# Altium PCB PCB1.PcbDoc
Units mil, origin at the board's own origin, x right, y up, seen from the top; angles counter-clockwise.
Board outline 3570 x 3040 mil, 2 copper layers (Top Layer, Bottom Layer); 32 components, 26 nets, 89 pads, 2 vias.
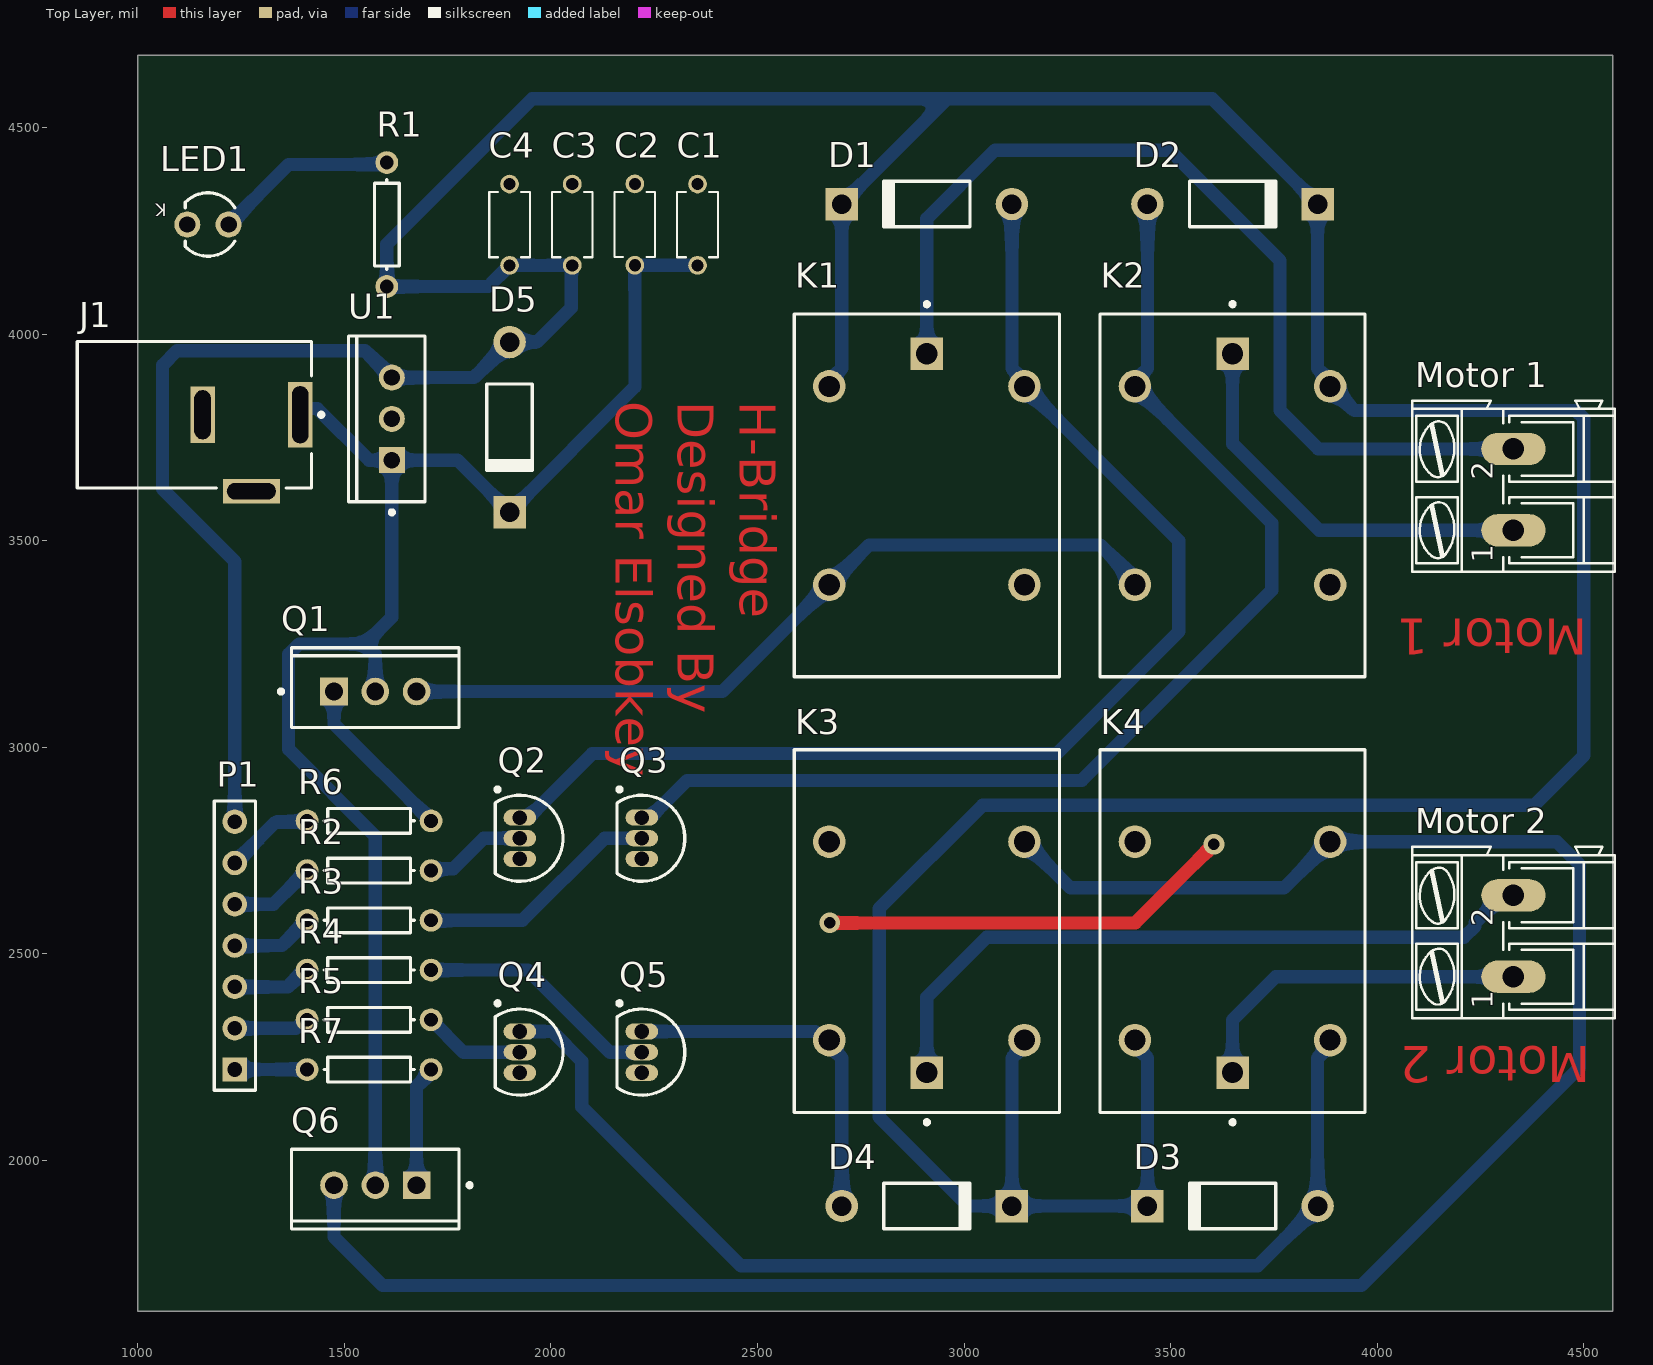
[diagram p0: Top Layer view]
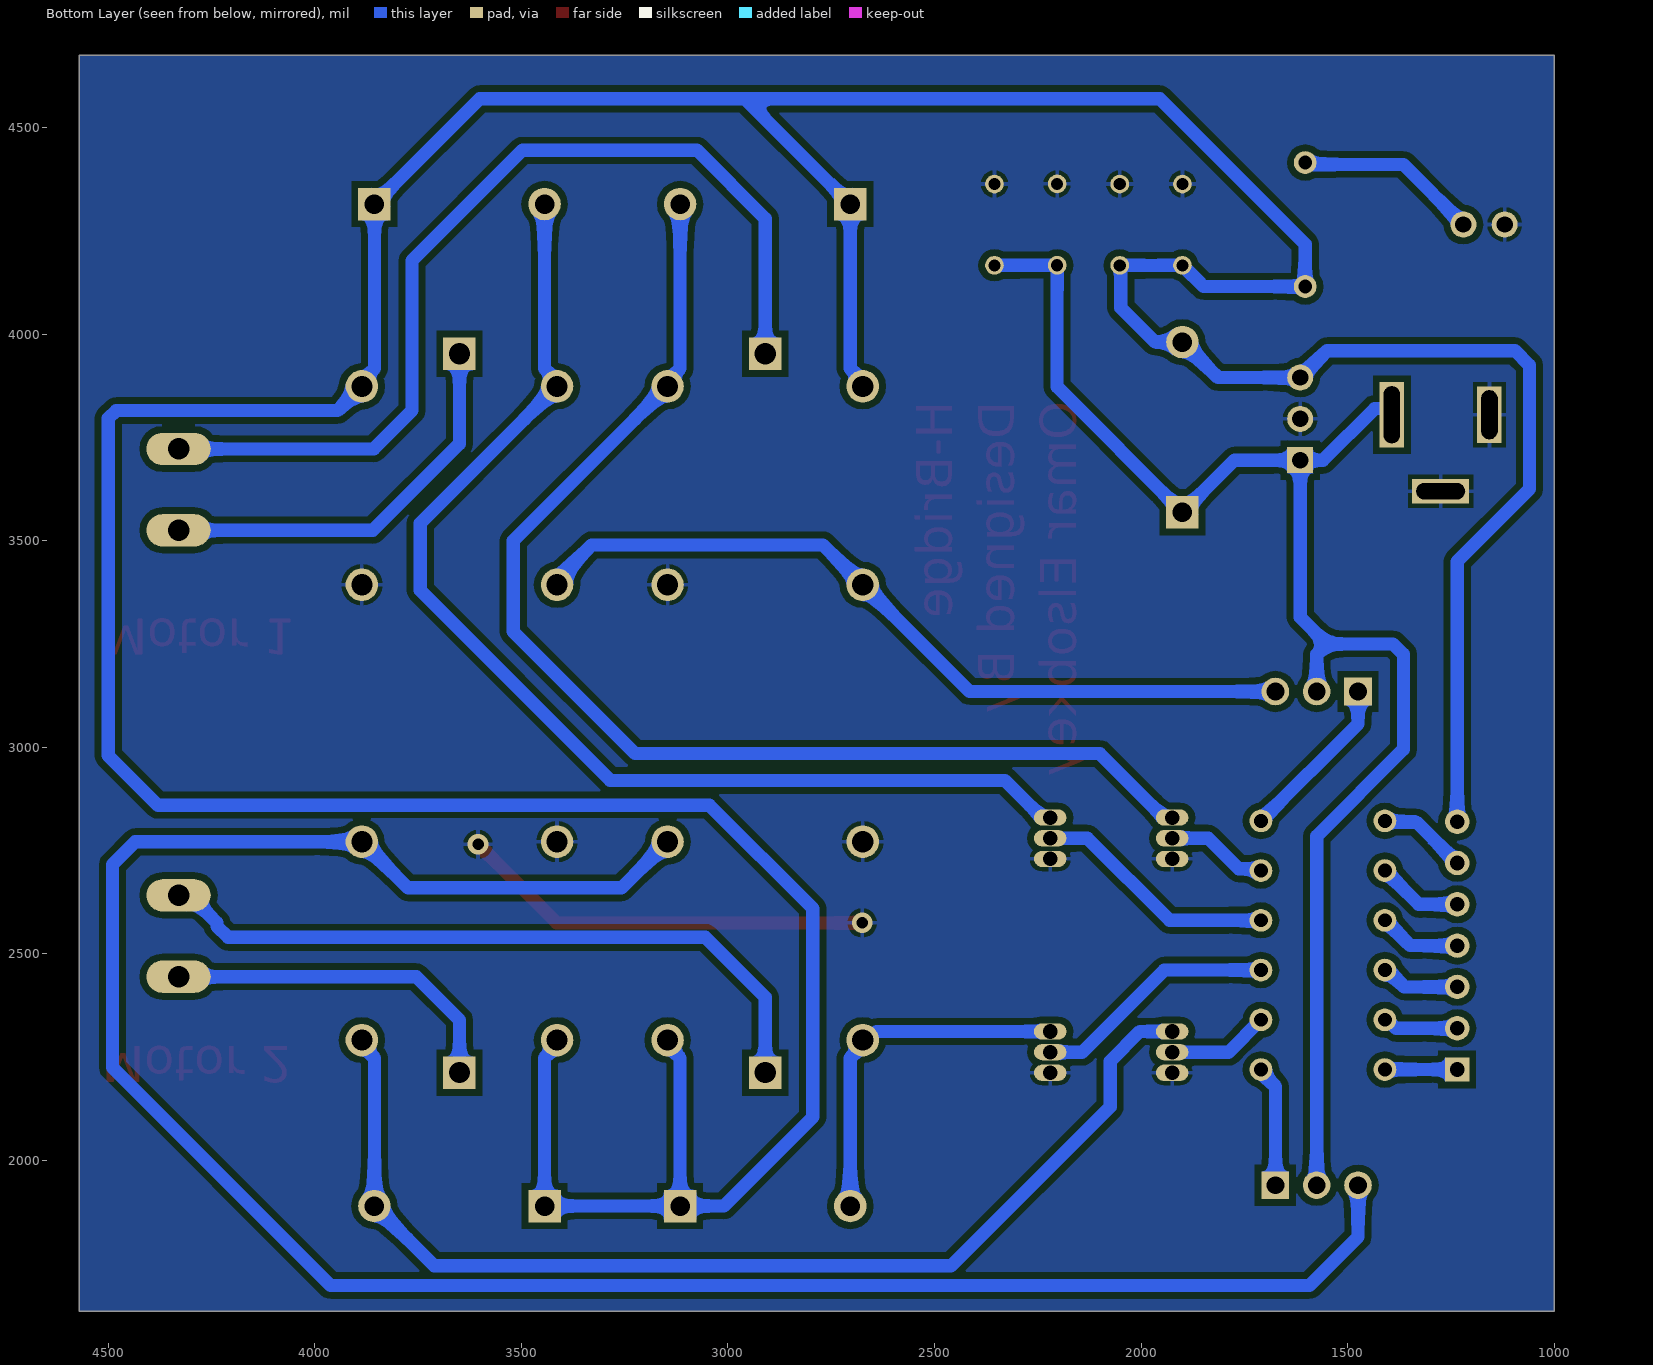
[diagram p1: Bottom Layer view, seen from below]

## Layer stack, top to bottom
Top Solder: solder mask 0.4, Solder Resist, Dk 3.5
Top Layer: signal copper 1.4
Dielectric 1: dielectric 12.6, FR-4, Dk 4.8
Bottom Layer: signal copper 1.4
Bottom Solder: solder mask 0.4, Solder Resist, Dk 3.5

## Board outline
1000,1635 4570,1635 4570,4675 1000,4675

## Design rules (kind name [scope] priority, off if disabled: settings)
Clearance B_GND [InNamedPolygon('B_GND')] p1: gap=16 ignorepadtopadclearanceinfootprint=FALSE
Clearance [All] p2: gap=16 ignorepadtopadclearanceinfootprint=FALSE
PolygonConnect [All] p1: connectstyle=Relief reliefconductorwidth=10 reliefentries=4 polygonreliefangle="90 Angle" airgapwidth=10
RoutingVias [All] p1: holewidth=28 width=50 viastyle="Through Hole" minholewidth=28 minwidth=50 maxholewidth=28 maxwidth=50
SolderMaskExpansion [All] p1: expansion=4 istentingtop=FALSE
UnRoutedNet [All] p1: checkbadconnections=TRUE
Width [All] p1: maxlimit=32 minlimit=32 preferedwidth=32
29 further rules are at their usual default settings.

## Components (designator, comment, footprint, x,y, rotation, side; value= is the part's Value field where it differs from the comment)
C1 "RDE5C2A220J0M1H03A" CAP_RDE5C2A220J0M1H03A 2355,4265 r90 top
C2 "RDE5C2A220J0M1H03A" CAP_RDE5C2A220J0M1H03A 2203.33,4265.33 r90 top
C3 "RDE5C2A220J0M1H03A" CAP_RDE5C2A220J0M1H03A 2051.67,4265 r90 top
C4 "RDE5C2A220J0M1H03A" CAP_RDE5C2A220J0M1H03A 1900,4265 r90 top
D1 "Diode 1N4004" DO-41 2910,4315 r180 top
D2 "Diode 1N4004" DO-41 3650,4315 r0 top
D3 "Diode 1N4004" DO-41 3650,1889.65 r180 top
D4 "Diode 1N4004" DO-41 2910,1889.65 r0 top
D5 "Diode 1N4004" DO-41 1900,3775 r270 top
J1 "PJ-002A" CUI-PJ-002A_V 1275,3805 r180 top
K1 "JS1-5V-F" FP-JS1-5V-F-MFG 2910,3610 r270 top
K2 "JS1-5V-F" FP-JS1-5V-F-MFG 3650,3610 r270 top
K3 "JS1-5V-F" FP-JS1-5V-F-MFG 2910,2555 r90 top
K4 "JS1-5V-F" FP-JS1-5V-F-MFG 3650,2555 r90 top
LED1 "151031SS06000" "Type 3mm" 1170,4265.45 r180 top
"Motor 1" "AK300/2" AK300/2 4330,3722.32 r90 top
"Motor 2" "AK300/2" AK300/2 4330,2641.73 r90 top
P1 "Header 7" HDR1X7 1235,2220 r90 top
Q1 "TIP120G" ONSC-TO-220-3-221A-09 1575,3135 r90 top
Q2 "NPN" TO-226-AA 1925,2779.84 r180 top
Q3 "NPN" TO-226-AA 2220,2779.84 r180 top
Q4 "NPN" TO-226-AA 1925,2262.13 r180 top
Q5 "NPN" TO-226-AA 2220,2262.13 r180 top
Q6 "TIP120G" ONSC-TO-220-3-221A-09 1575,1940 r270 top
R1 "Res1" AXIAL-0.3 1602.8,4265.33 r90 top value=1K
R2 "Res1" AXIAL-0.3 1560,2701.57 r0 top value=1K
R3 "Res1" AXIAL-0.3 1560,2581.18 r0 top value=1K
R4 "Res1" AXIAL-0.3 1560,2460.79 r0 top value=1K
R5 "Res1" AXIAL-0.3 1560,2340.39 r0 top value=1K
R6 "Res1" AXIAL-0.3 1560,2821.97 r0 top value=1K
R7 "Res1" AXIAL-0.3 1560,2220 r0 top value=1K
U1 "LM7805CT" FAIR-TO-220-3 1615,3795 r180 top

## Footprints (in the part's own frame and the unit in brackets; to place one, negate y for a bottom-side part, rotate by r counter-clockwise, add the part's x,y. Pads: shape width x height; smd on the part's side, far side on the other; paste and mask are expansions set on the pad)
AK300/2 [mil]
  oval 78x156 hole 52: 1(-197,0) 2(0,0)
  silkscreen extent -297,-245 117,245, body extent -319,-157 98,197, height 496
AXIAL-0.3 [mm] "Axial Device, Thru-Hole; 2 Leads; 0.3 in Pin Spacing"
  round 1.4 hole 0.85: 1(-3.81,0) 2(3.81,0)
  silkscreen extent -2.77,-0.76 2.77,0.76
CAP_RDE5C2A220J0M1H03A [mm]
  round 1.15 hole 0.75: 1(-2.5,0) 2(2.5,0)
  silkscreen extent -2,-1.25 2,1.25, body extent -2.75,-1.27 2.75,1.23, height 6
CUI-PJ-002A_V [mm] "THD, 3-Leads, Body 14.4x9mm, Height 11mm"
  rect 1.5x4 hole 1 slot 3.5 at 90 deg: 1(-3,0)
  rect 1.5x3.5 hole 1 slot 3 at 90 deg: 2(3,0)
  rect 3.5x1.5 hole 1 slot 3 at 0 deg: 3(0,4.7)
  silkscreen extent -4.43,-4.5 10.7,4.5, body extent -3.7,-4.5 10.7,4.9, height 11
DO-41 [mm] "Diode, Axial; Body 5.2 x 2.7 mm (LxDia. max), Lead Dia. 0.86 mm (max)"
  round 2 hole 1.2: 1(-5.23,0)
  rect 2x2 hole 1.2: 2(5.23,0)
  silkscreen extent -2.65,-1.4 2.75,1.4
FAIR-TO-220-3 [mm] "FM, 3-Leads, Body 10.2x4.7mm, Pitch 2.54mm"
  rect 1.6x1.6 hole 1: 1(0,2.54)
  round 1.6 hole 1: 2(0,0) 3(0,-2.54)
  silkscreen extent -2.04,-5.1 2.66,5.87, body extent -2.04,-5.1 2.66,5.1, height 18.95
FP-JS1-5V-F-MFG [mm]
  rect 2x2 hole 1.3 paste-1000 mask+0: 1(-8.7,0)
  round 2 hole 1.3 paste-1000 mask+0: 2(-6.7,-6) 3(5.5,-6) 4(5.5,6) 5(-6.7,6)
  silkscreen extent -11.87,-8.15 11.15,8.15, body extent -11.25,-8.25 11.25,8.25, height 0.25
HDR1X7 [mm] "Connector; Header; 7 Position"
  rect 1.5x1.5 hole 0.9: 1(0,0)
  round 1.5 hole 0.9: 2(2.54,0) 3(5.08,0) 4(7.62,0) 5(10.16,0) 6(12.7,0) 7(15.24,0)
  silkscreen extent -1.27,-1.27 16.51,1.27
ONSC-TO-220-3-221A-09 [mm] "FM, 3-Leads, Body 10.3x4.85mm, Pitch 2.54mm"
  rect 1.7x1.7 hole 1.1: 1(0,2.54)
  round 1.7 hole 1.1: 2(0,0) 3(0,-2.54)
  silkscreen extent -2.2,-5.15 2.7,5.92, body extent -2.18,-5.15 2.67,5.15, height 19.85
TO-226-AA [mm] "TO, Flat Index; 3 In-Line, Axial Leads; Body Dia. 4.8mm; Leads 0.55 x 0.51 mm (max)"
  oval 2x1 hole 0.9: 1(0,-1.27) 2(0,0) 3(0,1.27)
  silkscreen extent -2.65,-3.13 1.52,2.65, body extent -2.65,-2.66 1.52,2.66, height 5.33
"Type 3mm" [mm] "THT, LED-3mm, 2pin- Body 4.15mm(max)"
  round 1.6 hole 1: 1(1.27,0) 2(-1.27,0)
  silkscreen extent -1.66,-1.95 1.4,1.95, body extent -1.93,-1.94 1.87,1.94, height 10.5

## Part data
C1 C2 C3 C4: "Lead Capacitor C0G_EIA_ with Capacitance: 22pF and Rated Voltage: 100Vdc", Package="Radial Murata", Availability=Unavailable, MF=Murata, MP=RDE5C2A220J0M1H03A, Price=None, SnapEDA_Link=https://www.snapeda.com/parts/RDE5C2A220J0M1H03A/Murata/view-part/4545539/?ref=snap
D1 D2 D3 D4 D5: "1 Amp General Purpose Rectifier", Code_JEDEC=DO-204-AL, ComponentLink1Description="Manufacturer Link", ComponentLink1URL=http://www.fairchildsemi.com/, ComponentLink2Description=Datasheet, ComponentLink2URL=http://www.fairchildsemi.com/ds/1N%2F1N4001.pdf, DatasheetVersion=1998, LatestRevisionDate=17-Jul-2002, LatestRevisionNote="Re-released for DXP Platform.", PackageDescription="Diode, Axial; Body 5.2 x 2.7 mm (LxDia. max), Lead Dia. 0.86 mm (max)", PackageReference=DO-41, PackageVersion=Aug-1999, Published=8-Jun-2000, Publisher="Altium Limited"
J1: library part CMP-2000-06895-1, "Through Hole Right Angle DC Power Jack, 2.5 A, 2 mm Center Pin, 3 Position, -25 to 85 degC, RoHS, Bulk", Current Rating=2.5A, Flammability Rating=UL94V-0, Insulation Resistance=50MOhms, Manufacturer=CUIInc., Operating Temperature Range=-25Cto+85C, Package Description="3-Pin Through Hole Device, Body 14.4 x 9 mm, Height 11 mm", Voltage Rating=24V, Brand=CUI, Connector Type=DCPowerJack, Contact Gender=Male, Contact Material=Copper, Contact Plating=Nickel, Datasheet URL=http://www.cui.com/product/resource/pj-002a.pdf, Datasheet Version="Rev. 1.03, 04/2016", Factory Pack Quantity=500, Housing Material=PolybutyleneTerephthalate(PBT), Inside Contact Diameter=2mm, Manufacturer URL=http://www.cui.com/, Mounting Angle=Right, Mounting Style=ThroughHole, Mounting Technology=ThroughHole, Outside Contact Diameter=6.5mm, Package Reference=PJ-002A, Product=Jacks, Product Category=DCPowerConnectors, RoHS=True, Termination Style=ThroughHole
K1 K2 K3 K4: library part CMP-05606-000016-1, "RELAY GEN PURPOSE SPDT 10A 5V", Ambient Temperature Range High=+70°C, Ambient Temperature Range Low=-40°C, Coil Current=72mA, Coil Power=360mW, Coil Resistance=69.4Ω, Coil Voltage=5V, Manufacturer=Panasonic, Switching Current=10A, Switching Power=150W, Temperature="-40°C to +70°C", Automotive=No, Category=Relay, Coil Type=Non-Latching, ComponentLink2Description=Datasheet, ComponentLink2URL=https://www3.panasonic.biz/ac/e_download/control/relay/power/catalog/mech_eng_js.pdf?via=ok, Device Class L1=Electromechanical, Device Class L2=Relays, Device Class L3="Power Relays", Digikey Description="RELAY GEN PURPOSE SPDT 10A 5V", Height=16.8mm, Lead Free=Yes, Manufacturer Part Number=JS1-5V-F, Mouser Description="JS Series 10 A SPDT 5 V Through Hole Sealed Miniature Non-Polarized Power Relay", Number Of Contacts=1, Octopart=https://octopart.com/js1-5v-f-panasonic-39428621, Package=JS1-5V-F, RoHS=TRUE, Standoff Height=0.3mm, Temperature Range High=+70°C, Temperature Range Low=-40°C, Throw Configuration=SPDT
LED1: library part CMP-1488-00002-1, "THT LED round mono-color color lens, WL-TMRW, Super Red", Emitting color="Super Red", Manufacturer="Wuerth Elektronik", ComponentLink1Description="Manufacturer URL", ComponentLink1URL=http://www.we-online.com, ComponentLink2Description=Datasheet, ComponentLink2URL=http://katalog.we-online.de/pbs/datasheet/7448042001.pdfhttp://katalog.we-online.de/pbs/datasheet/7448042001.pdfhttp://katalog.we-online.de/pbs/datasheet/7448042001.pdfhttp://katalog.we-online.de/pbs/datasheet/151031SS06000.pdf, PackageReference="Type 3mm", PartNumber=151031SS06000
"Motor 1" "Motor 2": Package=None, Availability=Unavailable, Check_prices=https://www.snapeda.com/parts/AK300/3/Altech/view-part/2748485/?ref=eda, MF=Altech, MP=AK300/3, Price=None, SnapEDA_Link=https://www.snapeda.com/parts/AK300/3/Altech/view-part/2748485/?ref=snap
P1: "Header, 7-Pin", LatestRevisionDate=17-Jul-2002, LatestRevisionNote="Re-released for DXP Platform.", Publisher="Altium Limited"
Q1 Q6: library part CMP-1047-00134-1, "Plastic Medium-Power, Complementary Silicon Transistor, 3-Pin TO-220, Pb-Free, Tube", Manufacturer="On Semiconductor", ComponentLink1Description="Manufacturer URL", ComponentLink1URL=http://www.onsemi.com/, ComponentLink2Description=Datasheet, ComponentLink2URL=http://www.onsemi.cn/pub_link/Collateral/TIP120-D.PDF, ComponentLink3Description="Package Specification", ComponentLink3URL=http://www.onsemi.com/pub_link/Collateral/221A-09.PDF, DatasheetVersion="Rev. 8", IC Continuous (A)=5, Mounting Technology="Through Hole", PackageDescription="3-Pin Flange Mount, Vertical Straight Lead, Body 9.97 x 4.445 mm, Pitch 2.54 mm", PackageReference=TO-220-3-221A-09, PackageVersion="Rev. AG, 09/2011", Packing=Tube, PartNumber=TIP120G, Polarity=NPN, RoHS=TRUE
Q2 Q3 Q4 Q5: "NPN Bipolar Transistor", Code_JEDEC=TO-226-AA, LatestRevisionDate=17-Jul-2002, LatestRevisionNote="Re-released for DXP Platform.", PackageDescription="TO, Flat Index; 3 In-Line, Axial Leads; Body Dia. 4.8mm; Leads 0.55 x 0.51 mm (max)", PackageReference=TO-226-AA, Published=8-Jun-2000, Publisher="Altium Limited"
R1 R2 R3 R4 R5 R6 R7: "Resistor", LatestRevisionDate=17-Jul-2002, LatestRevisionNote="Re-released for DXP Platform.", PackageDescription="Axial Device, Thru-Hole; 2 Leads; 0.3 in Pin Spacing", PackageReference=AXIAL-0.3, Published=8-Jun-2000, Publisher="Altium Limited"
U1: library part CMP-2000-04938-1, "Positive Voltage Regulator, 5 V, 1 A, -40 to 125 degC, 3-Pin TO-220, RoHS, Tube", Manufacturer=FairchildSemiconductor, Maximum Input Voltage=35V, Maximum Output Current=2.2(Typ)A, Maximum Quiescent Current=8mA, Operating Temperature=-40to125degC, Output Voltage=5V, Package=3TO-220AB, Package Description="3-Pin Through Hole Device, Body 10 x 4.5 mm, Pitch 2.54 mm", Package Reference=TO-220, Typical Dropout Voltage @ Current=2@1AV, Accuracy=±4%, Category=LinearRegulator, Datasheet URL=https://datasheet.ciiva.com/26904/lm7805ct-26904988.pdf, Datasheet Version=Aug-12, Line Regulation=100mV, Load Regulation=100mV, Manufacturer URL=https://www.fairchildsemi.com/, Mounting=ThroughHole, Number of Outputs=1, Output Type=Fixed, Package URL=https://www.fairchildsemi.com/package-drawings/TO/TO220B03.pdf, Packaging=Rail/Tube, Polarity=Positive, Rad Hard=No, Type=Linear

## Via types
v1: diameter 50, hole 28, Top Layer to Bottom Layer, 2 vias

## Nets (pads, with @x,y where several pads share a name; then routed paths per layer and width w, separated by ;. In a path a pad name is that pad's centre, name@x,y a point inside that pad or via, vN(x,y) a via of type N, cw(c..) or ccw(c..) an arc to the next point about the centre after c; other vN are vias at no path point)
+5: C3.1 C4.1 D1.2 D2.2 D3.2 D4.2 D5.1 K1.2 K2.5 K3.2 K4.5 P1.7 R1.1 U1.3 | length 12123.1
  Bottom Layer w32: P1.7 1235,3450 1060,3625 1060,3925 1095,3960 1550,3960 U1.3 1814.09,3895 D5.1 1965.91,3980.91 2049.13,4064.13 2049.13,4164.03 C3.1 C4.1 1848.76,4115.33 R1.1 1602.8,4217.8 1955,4570 2959.09,4570 ; K1.2 2673.78,3886.43 2704.09,3916.74 D1.2 2959.09,4570 ; 2963.25,4570 2959.09,4570 ; K3.2 3146.22,2278.57 3115.91,2248.26 D4.2 ; K4.5 3413.78,2278.57 3444.09,2248.26 D3.2 D4.2 ; 2959.09,4570 3600.91,4570 D2.2 3855.91,3916.74 3886.22,3886.43 K2.5 3945,3815 4481.25,3815 4500,3796.25 4500,2980 4380,2860 3045,2860 2795,2610 2795,2105 3010.35,1889.65 D4.2
COM1: "Motor 1.2" K1.1 | length 2327.6
  Bottom Layer w32: K1.1 2910,4280 3075,4445 3497.62,4445 3765,4177.62 3765,3815 3857.68,3722.32 4330,3722.32
COM2: "Motor 1.1" K2.1 | length 984.4
  Bottom Layer w32: K2.1 3650,3735 3859.68,3525.32 4330,3525.32
COM3: "Motor 2.2" K3.1 | length 1709.6
  Bottom Layer w32: K3.1 2910,2395 3055,2540 4210,2540 4236.94,2566.94 4236.94,2575.22 4303.45,2641.73 4330,2641.73
COM4: "Motor 2.1" K4.1 | length 850.9
  Bottom Layer w32: K4.1 3650,2340 3754.73,2444.73 4330,2444.73
ena: P1.6 R6.1 | length 217.2
  Bottom Layer w32: P1.6 1334.44,2819.44 1407.47,2819.44 R6.1
enb: P1.1 R7.1 | length 175
  Bottom Layer w32: P1.1 R7.1
GND: C1.2 C2.2 C3.2 C4.2 J1.2 J1.3 K1.4 K2.4 K3.4 K4.4 LED1.1 Q2.3 Q3.3 Q4.3 Q5.3 U1.2 | length 1008.7
  Top Layer w32: v1(2675,2575) 3415,2575 v1(3605,2765)
in1: P1.5 R2.1 | length 208.8
  Bottom Layer w32: P1.5 1328.43,2620 R2.1
in2: P1.4 R3.1 | length 200.3
  Bottom Layer w32: P1.4 1348.82,2520 R3.1
in3: P1.3 R4.1 | length 191.9
  Bottom Layer w32: P1.3 1362.96,2420 1403.74,2460.79 R4.1
in4: P1.2 R5.1 | length 183.4
  Bottom Layer w32: P1.2 1383.35,2320 1403.74,2340.39 R5.1
NetD1_1: D1.1 K1.5 Q2.1 | length 2983.8
  Bottom Layer w32: Q2.1 1944.68,2829.84 2099.84,2985 3225,2985 3520,3280 3520,3500 K1.5 3146.22,3886.43 3115.91,3916.74 D1.1
NetD2_1: D2.1 K2.2 Q3.1 | length 2837.6
  Bottom Layer w32: Q3.1 2222.41,2832.25 2242.09,2832.25 2329.84,2920 3285,2920 3745,3380 3745,3542.56 K2.2 3413.78,3886.43 3444.09,3916.74 D2.1
NetD3_1: D3.1 K4.2 Q4.1 | length 2704.3
  Bottom Layer w32: Q4.1 2002.87,2312.13 2075,2240 2075,2130 2460,1745 3711.26,1745 D3.1 3855.91,2248.26 3886.22,2278.57 K4.2
NetD4_1: D4.1 K3.5 Q5.1 | length 876.6
  Bottom Layer w32: Q5.1 2640.23,2312.13 2661.13,2291.22 K3.5 2673.78,2278.57 2704.09,2248.26 D4.1
NetLED1_2: LED1.2 R1.2 | length 444.9
  Bottom Layer w32: LED1.2 1365.46,4410.91 1598.37,4410.91 R1.2
NetQ1_1: Q1.1 R6.2 | length 410.4
  Bottom Layer w32: Q1.1 1475,3056.97 R6.2
NetQ2_2: Q2.2 R2.2 | length 247.4
  Bottom Layer w32: R2.2 1714.42,2706 1763.79,2706 1837.63,2779.84 Q2.2
NetQ3_2: Q3.2 R3.2 | length 592.3
  Bottom Layer w32: R3.2 1931.18,2581.18 2129.84,2779.84 Q3.2
NetQ4_2: Q4.2 R5.2 | length 247.4
  Bottom Layer w32: R5.2 1788.27,2262.13 Q4.2
NetQ5_2: Q5.2 R4.2 | length 592.3
  Bottom Layer w32: R4.2 1944.21,2460.79 2142.87,2262.13 Q5.2
NetQ6_1: Q6.1 R7.2 | length 294.5
  Bottom Layer w32: Q6.1 1675,2178.74 1710,2213.74 R7.2
NO: K1.3 K2.3 Q1.3 | length 1933.2
  Bottom Layer w32: Q1.3 2415.31,3135 K1.3 2770.31,3490 3329.89,3490 3413.78,3406.11 K2.3
NO2: K3.3 K4.3 Q6.3 | length 5357.9
  Bottom Layer w32: Q6.3 1475,1815 1593,1697 3962,1697 4490,2225 4490,2716.25 4434.72,2771.54 K4.3 3774.69,2660 3257.76,2660 K3.3
VCC: C1.1 C2.1 D5.2 J1.1 Q1.2 Q6.2 U1.1 | length 3651.2
  Bottom Layer w32: J1.1@1392.64,3820 1435,3820 1560,3695 U1.1 ; Q6.2 1575,2785 1365,2995 1365,3225 1390,3250 1550,3250 ; Q1.2 1575,3225 1550,3250 ; C1.1 2354.83,4166.74 2203.5,4166.74 C2.1 2203.33,3872.43 D5.2 1774.09,3695 U1.1 ; 1550,3250 1615,3315 U1.1

## Polygon pours and split planes (outlines as drawn)
GND on Bottom Layer "B_GND" (solid, remove dead copper, pour order 0): 1000,1635 4570,1635 4570,4675 1000,4675

## Other copper
Top Layer:
  text "H-Bridge / Designed By / Omar Elsobkey" at 2127.94,3837.45 h150 r270
  text "Motor 1" at 4508.72,3339.94 h150 r180
  text "Motor 2" at 4516.22,2306.03 h150 r180

## Text inside footprints (layer, text, board x,y; h text height)
LED1: Top Overlay "K" at 1070,4315.45 h30 r180; Top Courtyard "K" at 1070,4315.45 h30 r180
"Motor 1": Top Overlay "2" at 4280,3647.32 h50 r90; Top Overlay "1" at 4280,3447.32 h50 r90
"Motor 2": Top Overlay "2" at 4280,2566.73 h50 r90; Top Overlay "1" at 4280,2366.73 h50 r90